# EAGLE board apu_mega_shield (EAGLE 6.5.0)
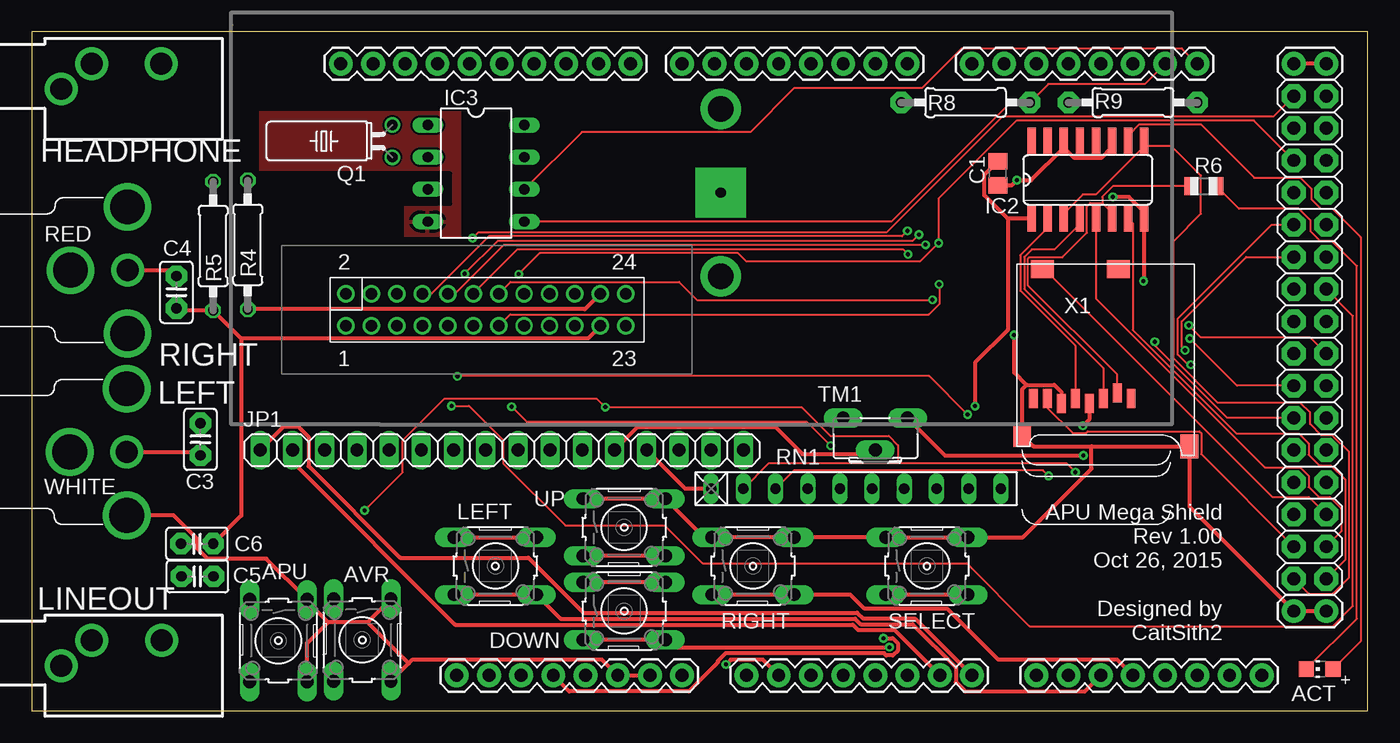
[diagram p0: board, top side]
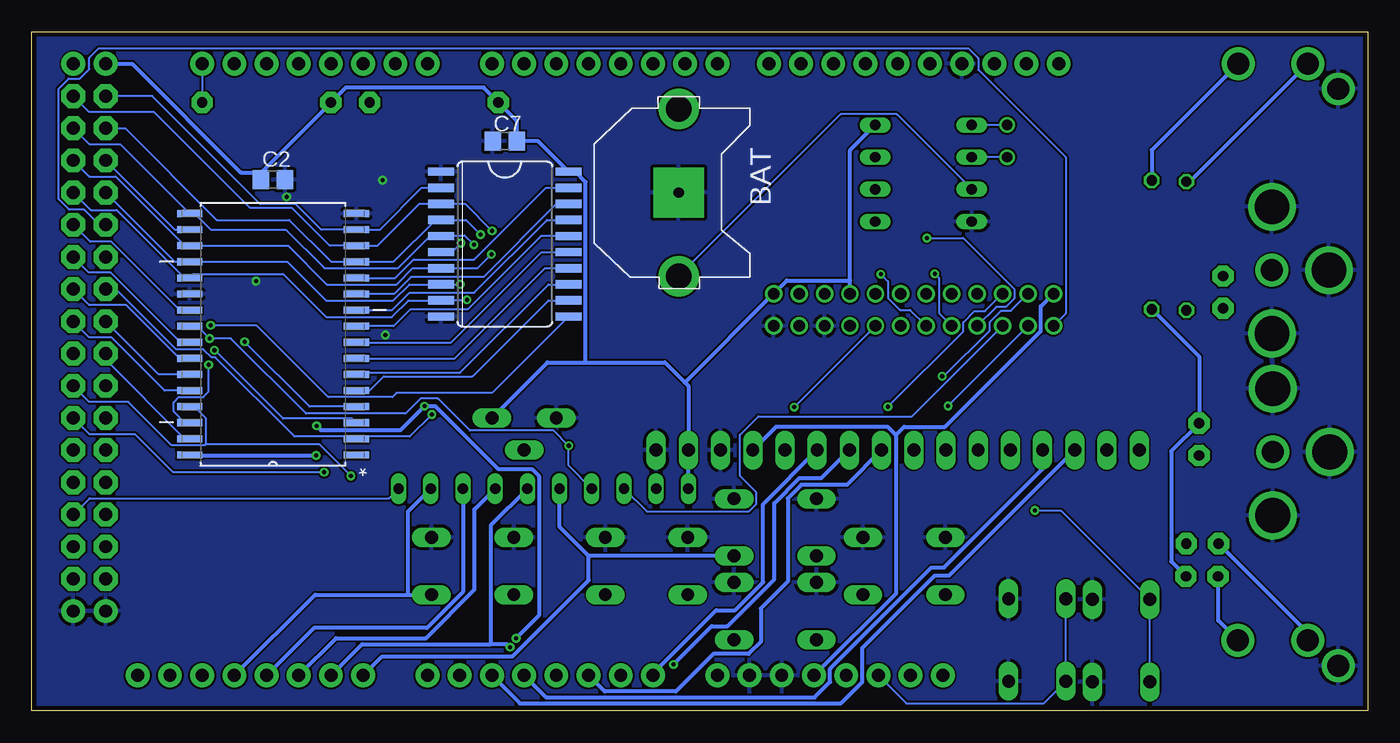
[diagram p1: board, bottom side, seen from below]

Size 105.39 x 53.59 mm. Coordinates in mm from the lower left corner, seen from the top.
Outline: 0,0 105.39,0 105.39,53.59 0,53.59 0,0
Copper layers (1*16): Top 0.0356mm / dielectric 1.5011mm / Bottom 0.0356mm
Design rules "oshpark-2layer": minimum track width 6mil, minimum drill 13mil, track to track 6mil, track to pad 6mil, pad to pad 6mil, via to via 6mil, smd to smd 6mil, copper to edge 15mil, drill to drill 6mil, minimum pad ring 7mil, minimum via ring 7mil, stop-mask expansion 4mil, vias tented up to drill 0mil, thermal gap 10mil
Net classes: 0 default: width 0.152 mm, clearance 0.152 mm; 1 supply: width 0.305 mm, clearance 0.152 mm; 2 audio: width 0.305 mm, clearance 0.152 mm
tRestrict: 8 lines

## Footprints (pad centres in the part's own frame; a part is rotated, then mirrored left to right if it is on the bottom)
CHIP-LED0805 = smd 1.2 x 1.2: A 0,-1.05; C 0,1.05
B3F-10XX = drill 1.016 long: 1 -3.251,2.261; 2 3.251,2.261; 3 -3.251,-2.261; 4 3.251,-2.261
CR1220-THM = drill 2 pad 3.175: +1 -6.604,0; +2 6.604,0 | drill 0.8 pad 3.962 square: - 0,0
C0805 = smd 1.3 x 1.5: 1 -0.95,0; 2 0.95,0
C025-025X050 = drill 0.813 pad 1.676 octagon: 1 -1.27,0; 2 1.27,0
SO20W = smd 0.66 x 2.032: 1 -5.715,-5.029; 2 -4.445,-5.029; 3 -3.175,-5.029; 4 -1.905,-5.029; 5 -0.635,-5.029; 6 0.635,-5.029; 7 1.905,-5.029; 8 3.175,-5.029; 9 4.445,-5.029; 10 5.715,-5.029; 11 5.715,5.029; 12 4.445,5.029; 13 3.175,5.029; 14 1.905,5.029; 15 0.635,5.029; 16 -0.635,5.029; 17 -1.905,5.029; 18 -3.175,5.029; 19 -4.445,5.029; 20 -5.715,5.029
SO16 = smd 0.66 x 2.032: 1 -4.445,-3.073; 2 -3.175,-3.073; 3 -1.905,-3.073; 4 -0.635,-3.073; 5 0.635,-3.073; 6 1.905,-3.073; 7 3.175,-3.073; 8 4.445,-3.073; 9 4.445,3.073; 10 3.175,3.073; 11 1.905,3.073; 12 0.635,3.073; 13 -0.635,3.073; 14 -1.905,3.073; 15 -3.175,3.073; 16 -4.445,3.073
DIL08 = drill 0.813 long: 1 -3.81,-3.81; 2 -1.27,-3.81; 3 1.27,-3.81; 4 3.81,-3.81; 5 3.81,3.81; 6 1.27,3.81; 7 -1.27,3.81; 8 -3.81,3.81
1X16 = drill 1.016 long: 1 -19.05,0; 2 -16.51,0; 3 -13.97,0; 4 -11.43,0; 5 -8.89,0; 6 -6.35,0; 7 -3.81,0; 8 -1.27,0; 9 1.27,0; 10 3.81,0; 11 6.35,0; 12 8.89,0; 13 11.43,0; 14 13.97,0; 15 16.51,0; 16 19.05,0
TC38H = drill 0.813: 1 -1.27,0; 2 1.27,0
0207/10 = drill 0.813 octagon: 1 -5.08,0; 2 5.08,0
R0805 = smd 1.1 x 1.4: 1 -1,0; 2 1,0
0207/10' = drill 0.813 pad 1.676 octagon: 1 -5.08,0; 2 5.08,0
RN-10 = drill 0.813 long: 1 -11.43,0; 2 -8.89,0; 3 -6.35,0; 4 -3.81,0; 5 -1.27,0; 6 1.27,0; 7 3.81,0; 8 6.35,0; 9 8.89,0; 10 11.43,0
CA6H = drill 1.016 long: A -2.54,0; E 2.54,0; S 0,2.54
SOIC127P1412X305-32N = smd 1.981 x 0.559: 1 -6.579,9.525; 2 -6.579,8.255; 3 -6.579,6.985; 4 -6.579,5.715; 5 -6.579,4.445; 6 -6.579,3.175; 7 -6.579,1.905; 8 -6.579,0.635; 9 -6.579,-0.635; 10 -6.579,-1.905; 11 -6.579,-3.175; 12 -6.579,-4.445; 13 -6.579,-5.715; 14 -6.579,-6.985; 15 -6.579,-8.255; 16 -6.579,-9.525; 17 6.579,-9.525; 18 6.579,-8.255; 19 6.579,-6.985; 20 6.579,-5.715; 21 6.579,-4.445; 22 6.579,-3.175; 23 6.579,-1.905; 24 6.579,-0.635; 25 6.579,0.635; 26 6.579,1.905; 27 6.579,3.175; 28 6.579,4.445; 29 6.579,5.715; 30 6.579,6.985; 31 6.579,8.255; 32 6.579,9.525
APU = drill 0.914: P$1 0,0; P$2 0,-2.54; P$3 -2.007,0; P$4 -2.007,-2.54; P$5 -4.013,0; P$6 -4.013,-2.54; P$7 -6.02,0; P$8 -6.02,-2.54; P$9 -8.026,0; P$10 -8.026,-2.54; P$11 -10.033,0; P$12 -10.033,-2.54; P$13 -12.04,0; P$14 -12.04,-2.54; P$15 -14.046,0; P$16 -14.046,-2.54; P$17 -16.053,0; P$18 -16.053,-2.54; P$19 -18.059,0; P$20 -18.059,-2.54; P$21 -20.066,0; P$22 -20.066,-2.54; P$23 -22.073,0; P$24 -22.073,-2.54
SJ1-3533N = drill 1.727: GND -4.7,0; LEFT 3.2,2; RIGHT -2.3,2
RCJ-01X = drill 2.743: PGND1 0,5; PGND2 4.5,0; PGND3 0,-5 | drill 1.727: PSIG 0,0
ARDUINO_MEGA2560_LITE_NO_LABELS = drill 1.016 pad 1.88: 0 63.5,50.8; 1 60.96,50.8; 2 58.42,50.8; 3 55.88,50.8; 3.3V 35.56,2.54; 4 53.34,50.8; 5 50.8,50.8; 5V 38.1,2.54; 5V. 93.98,50.8; 5V.. 96.52,50.8; 6 48.26,50.8; 7 45.72,50.8; 8 41.656,50.8; 9 39.116,50.8; 10 36.576,50.8; 11 34.036,50.8; 12 31.496,50.8; 13 28.956,50.8; 14 68.58,50.8; 15 71.12,50.8; 16 73.66,50.8; 17 76.2,50.8; 18 78.74,50.8; 19 81.28,50.8; 20 83.82,50.8; 21 86.36,50.8; A0 50.8,2.54; A1 53.34,2.54; A2 55.88,2.54; A3 58.42,2.54; A4 60.96,2.54; A5 63.5,2.54; A6 66.04,2.54; A7 68.58,2.54; A8 73.66,2.54; A9 76.2,2.54; A10 78.74,2.54; A11 81.28,2.54; A12 83.82,2.54; A13 86.36,2.54; A14 88.9,2.54; A15 91.44,2.54; AREF 23.876,50.8; GND 26.416,50.8; GND. 43.18,2.54; GND.. 40.64,2.54; GND... 93.98,7.62; GND.... 96.52,7.62; I/OREF 30.48,2.54; N/C 27.94,2.54; RESET 33.02,2.54; SCL1 18.796,50.8; SDA1 21.336,50.8; VIN 45.72,2.54 | drill 1.016 pad 1.88 octagon: 22 93.98,48.26; 23 96.52,48.26; 24 93.98,45.72; 25 96.52,45.72; 26 93.98,43.18; 27 96.52,43.18; 28 93.98,40.64; 29 96.52,40.64; 30 93.98,38.1; 31 96.52,38.1; 32 93.98,35.56; 33 96.52,35.56; 34 93.98,33.02; 35 96.52,33.02; 36 93.98,30.48; 37 96.52,30.48; 38 93.98,27.94; 39 96.52,27.94; 40 93.98,25.4; 41 96.52,25.4; 42 93.98,22.86; 43 96.52,22.86; 44 93.98,20.32; 45 96.52,20.32; 46 93.98,17.78; 47 96.52,17.78; 48 93.98,15.24; 49 96.52,15.24; 50 93.98,12.7; 51 96.52,12.7; 52 93.98,10.16; 53 96.52,10.16
MICROSD = smd 0.7 x 1.5: 1 9,-10.64; 2 7.9,-10.24; 3 6.8,-10.64; 4 5.7,-11.04; 5 4.6,-10.64; 6 3.5,-11.04; 7 2.4,-10.64; 8 1.3,-10.64 | smd 1.8 x 1.4: CD1 2,-0.44; CD2 8,-0.44 | smd 1.4 x 1.9: MT1 0.4,-13.54; MT2 13.6,-14.44

## Placement (x,y rotation side)
ACT  RED  [CHIP-LED0805]  101.6,3.3 90 top
APU  Reset  [B3F-10XX]  19.46,5.54 270 top
AVR  Reset  [B3F-10XX]  26.07,5.59 270 top
BAT  CR1220  [CR1220-THM]  54.36,40.89 270 bottom
C1  100nF  [C0805]  76.2,42.42 270 top
C2  100nF  [C0805]  86.36,41.91 180 bottom
C3  1uF  [C025-025X050]  13.31,21.42 270 top
C4  1uF  [C025-025X050]  11.42,33.03 90 top
C5  1uF  [C025-025X050]  13.08,10.61 180 top
C6  1uF  [C025-025X050]  13.04,13.19 180 top
C7  100nF  [C0805]  68.07,44.96 0 bottom
DOWN  [B3F-10XX]  46.74,7.87 0 top
IC1  74HCT573D  [SO20W]  68.07,36.83 270 bottom
IC2  4050D  [SO16]  83.31,41.91 0 top
IC3  DS1307  [DIL08]  35.05,42.42 270 top
JP1  [1X16]  37.08,20.57 0 top
LEFT  [B3F-10XX]  36.58,11.43 0 top
Q1  32.768  [TC38H]  28.45,44.96 90 top
R4  50  [0207/10]  17.04,36.77 270 top
R5  50  [0207/10]  14.31,36.68 270 top
R6  1K  [R0805]  92.46,41.4 0 top
R8  2.2k  [0207/10']  73.66,48.01 180 top
R9  2.2k  [0207/10']  86.87,48.01 0 top
RIGHT  [B3F-10XX]  56.9,11.43 0 top
RN1  [RN-10]  65.02,17.53 0 top
SELECT  [B3F-10XX]  70.61,11.43 0 top
TM1  10K  [CA6H]  66.55,23.11 180 top
U1  IS62C1024AL-35QLI  [SOIC127P1412X305-32N]  86.36,29.72 180 bottom
U$1  APU  [APU]  24.8,30.37 180 top
U$2  HEADPHONE  [SJ1-3533N]  7.03,49.07 0 top
U$3  HEADPHONE  [SJ1-3533N]  7.04,3.56 0 top
U$4  RCA  [RCJ-01X]  7.5,20.42 180 top
U$5  RCA  [RCJ-01X]  7.56,34.77 180 top
U$6  ARDUINO_MEGA_2560_LITENO_LABELS  [ARDUINO_MEGA2560_LITE_NO_LABELS]  5.59,0.25 0 top
UP  [B3F-10XX]  46.74,14.48 0 top
X1  MICROSD  [MICROSD]  77.72,35.31 0 top

## Library data of the parts
ACT BAT IC3 R6 R8 R9 X1 = adafruit
APU AVR DOWN LEFT RIGHT SELECT UP = switch-omron
C1 C2 C7 R4 R5 = rcl
C3-C6 = rcl-ez
IC1 = 74xx-eu
IC2 = 40xx
JP1 = pinhead
Q1 = crystal
RN1 = resistor-net; OC_FARNELL: unknown; OC_NEWARK: unknown
TM1 = pot
U1 = ISSI_By_element14_Batch_1; MPN: IS62C1024AL-35QLI; OC_FARNELL: 1869973; OC_NEWARK: 43M5399; PACKAGE: SOIC-32; SUPPLIER: INTEGRATED SILICON SOLUTION (ISSI)
U$1-U$5 = caitsith2
U$6 = E14_Arduino_revB

## Nets
!RD: RN1.4 U1.24 U$1.P$6 U$6.40
!WR: RN1.3 U1.29 U$1.P$5 U$6.41
+3V3 [supply]: C1.1 IC2.1 U$6.3.3V X1.4
A0: IC1.19 U1.12
A1: IC1.18 U1.11
A2: IC1.17 U1.10
A3: IC1.16 U1.9
A4: IC1.15 U1.8
A5: IC1.14 U1.7
A6: IC1.13 U1.6
A7: IC1.12 U1.5
A8: U1.28 U$6.37
A9: U1.27 U$6.36
A10: U1.26 U$1.P$3 U$6.35
A11: U1.2 U$1.P$4 U$6.34
A12: U1.25 U$6.33
A13: U1.3 U$6.32
A14: U1.23 U$6.31
A15: U1.30 U$1.P$1 U$6.30
A16: U1.31 U$6.38
A17: U1.4 U$6.42
ALEFT [audio]: C3.1 C5.1 R4.2 U$1.P$22
ARIGHT [audio]: C4.1 C6.1 R5.2 U$1.P$21
CD: RN1.10 U$6.49 X1.CD1
CLK: IC2.3 IC2.9 U$6.52
CS: IC2.7 U$6.53
D0: IC1.2 U1.15 U$1.P$7 U$6.22
D1: IC1.3 U1.14 U$1.P$8 U$6.23
D2: IC1.4 U1.13 U$1.P$9 U$6.24
D3: IC1.5 U1.17 U$1.P$10 U$6.25
D4: IC1.6 U1.18 U$1.P$11 U$6.26
D5: IC1.7 U1.19 U$1.P$12 U$6.27
D6: IC1.8 U1.20 U$1.P$13 U$6.28
D7: IC1.9 U1.21 U$1.P$14 U$6.29
DI: IC2.5 U$6.51
DO: U$6.50 X1.7
DOWN [supply]: DOWN.3 DOWN.4 RN1.6 U$6.A9
GND [supply]: APU.1 APU.2 AVR.1 AVR.2 BAT.- C1.2 C2.1 C7.1 DOWN.1 DOWN.2 IC1.1 IC1.10 IC2.8 IC2.11 IC2.14 IC3.4 JP1.14 JP1.16 LEFT.1 LEFT.2 RIGHT.1 RIGHT.2 SELECT.1 SELECT.2 TM1.E U1.16 U1.22 U$1.P$19 U$1.P$23 U$2.GND U$3.GND U$4.PGND1 U$4.PGND2 U$4.PGND3 U$5.PGND1 U$5.PGND2 U$5.PGND3 U$6.GND U$6.GND. U$6.GND.. U$6.GND... U$6.GND.... UP.1 UP.2 X1.6 X1.MT1 X1.MT2
LE: IC1.11 U$6.39
LEFT [supply]: LEFT.3 LEFT.4 RN1.7 U$6.A10
N$1: AVR.3 AVR.4 U$6.RESET
N$2 [audio]: C3.2 U$4.PSIG
N$3 [audio]: C4.2 U$5.PSIG
N$4 [audio]: C5.2 U$3.LEFT
N$5: ACT.A IC2.10
N$6: IC2.2 X1.5
N$7: IC2.6 R6.1 X1.2
N$8 [audio]: C6.2 U$3.RIGHT
N$9 [audio]: R4.1 U$2.LEFT
N$10 [audio]: R5.1 U$2.RIGHT
N$11: ACT.C R6.2
N$12: IC2.4 X1.3
N$13 [supply]: JP1.12 TM1.S
N$14 [supply]: JP1.11 U$6.A0
N$15 [supply]: JP1.10 U$6.A1
N$16 [supply]: JP1.9 U$6.A2
N$17 [supply]: JP1.4 U$6.A4
N$18 [supply]: JP1.3 U$6.A5
N$19 [supply]: JP1.2 U$6.A6
N$20 [supply]: JP1.1 U$6.A7
N$21: IC3.1 Q1.2
N$22: IC3.2 Q1.1
N$39: BAT.+2 IC3.3
RIGHT [supply]: RIGHT.3 RIGHT.4 RN1.8 U$6.A11
RST: APU.3 APU.4 RN1.2 U$1.P$15 U$6.43
SCL: IC3.6 R9.2 U$6.21
SDA: IC3.5 R8.1 U$6.20
SELECT [supply]: RN1.9 SELECT.3 SELECT.4 U$6.A12
UP [supply]: RN1.5 U$6.A8 UP.3 UP.4
VCC [supply]: C2.2 C7.2 IC1.20 IC3.8 JP1.13 JP1.15 R8.2 R9.1 RN1.1 TM1.A U1.32 U$1.P$2 U$1.P$18 U$1.P$24 U$6.5V U$6.5V. U$6.5V..

## Tracks (layer width: path | path; a pad name or v marks a point on that pad's centre or on a via)
!RD  (via drill 0.33 pad 0.69)
  Top 0.152: v63.03,20.92 61.17,22.79 39.06,22.79 v37.85,24 | U$6.40 95.08,25.65 v91.35,29.38
  Bottom 0.152: v37.85,24 31.91,29.94 31.91,30.64 31.02,31.53 30.19,31.53 U$1.P$6 | RN1.4 63.03,19.35 v63.03,20.92 64.22,22.11 70.82,22.11 73.34,24.63 74.73,24.63 75.91,23.45 83.76,23.45 89.69,29.38 v91.35,29.38 92.32,30.35 U1.24
!WR  (via drill 0.33 pad 0.69)
  Top 0.152: v80.22,18.53 79.77,18.98 60.13,18.98 RN1.3
  Bottom 0.152: RN1.3 56.87,15.72 48.82,15.72 48.23,16.32 48.23,17.24 49.53,18.55 49.53,21.77 48.07,23.23 35.95,23.23 U$1.P$5 | 91.67,21.05 91.76,20.96 94.34,20.96 97.77,24.38 100.84,24.38 U$6.41 | U1.29 92.57,24 91.67,23.1 91.67,21.05 | 91.67,21.05 82.73,21.05 v80.22,18.53
+3V3  (via drill 0.33 pad 0.69)
  Top 0.305: X1.4 83.42,22.99 v82.92,22.49 | 77,38.84 77,30.07 74.41,27.48 v74.41,24.05 | v67.18,5.73 67.92,5.73 68.31,5.34 68.31,4.76 67.93,4.38 67.39,4.38 67.23,4.54 54.73,4.54 54.12,3.93 54.12,3.83 51.83,1.54 42.4,1.54 U$6.3.3V | 77,38.84 75.14,40.69 75.14,42.31 C1.1 | IC2.1 77,38.84
  Bottom 0.305: v82.92,22.49 82.58,22.15 76.31,22.15 v74.41,24.05 73.57,24.05 68.61,19.09 65.93,19.09 65.37,18.53 65.37,7.54 v67.18,5.73
A0
  Bottom 0.152: U1.12 76.71,34.16 75.26,35.61 70.5,35.61 64.84,41.27 IC1.19
A1
  Bottom 0.152: IC1.18 63.99,40 69.76,34.24 75.47,34.24 76.81,32.89 U1.11
A2
  Bottom 0.152: U1.10 76.97,31.62 75.59,33 70.49,33 64.76,38.73 IC1.17
A3
  Bottom 0.152: IC1.16 65.22,37.46 71.01,31.67 75.53,31.67 76.85,30.35 U1.9
A4
  Bottom 0.152: U1.8 72.3,29.08 65.19,36.2 IC1.15
A5
  Bottom 0.152: U1.7 72.02,27.81 64.91,34.92 IC1.14
A6
  Bottom 0.152: U1.6 79.63,26.7 71.59,26.7 64.63,33.66 IC1.13
A7
  Bottom 0.152: U1.5 78.74,25.27 77.62,26.39 70.62,26.39 64.63,32.38 IC1.12
A8
  Bottom 0.152: U1.28 94.91,25.27 99.1,29.46 100.84,29.46 U$6.37
A9
  Bottom 0.152: U1.27 95.38,26.54 U$6.36
A10  (via drill 0.33 pad 0.69)
  Top 0.152: v33.11,24.06 34.5,24.06 37.19,21.37 37.19,19.53 42.09,14.63 49.93,14.63 52.92,11.64 73.75,11.64 78.7,6.69 102.64,6.69 104.22,8.27 104.22,31.16 U$6.35
  Bottom 0.152: U1.26 93.73,27.81 97.92,32 100.84,32 U$6.35 | v33.11,24.06 U$1.P$3
A11  (via drill 0.33 pad 0.69)
  Top 0.152: v73.83,23.39 70.81,26.41 v33.58,26.41
  Bottom 0.152: 79.78,21.65 84.67,21.65 90.91,27.89 91.21,27.89 91.86,28.53 94,28.53 98.75,33.27 U$6.34 | 79.78,21.65 U1.2 | v73.83,23.39 75.56,21.65 79.78,21.65 | v33.58,26.41 33.43,26.41 29.81,30.03 29.81,30.67 28.91,31.57 28.14,31.57 U$1.P$4
A12
  Bottom 0.152: U1.25 93.65,29.08 99.17,34.6 100.89,34.6 U$6.33
A13  (via drill 0.33 pad 0.69)
  Top 0.152: v90.97,28.46 90.71,28.73 90.71,30.72 95.8,35.81 U$6.32
  Bottom 0.152: U1.3 80.11,23.06 85.58,23.06 v90.97,28.46
A14
  Bottom 0.152: U1.23 93.72,31.62 99.11,37.01 100.77,37.01 U$6.31
A15  (via drill 0.33 pad 0.69)
  Top 0.152: v91.43,27.31 91.19,27.31 90.4,28.1 90.4,30.95 97.8,38.35 U$6.30
  Bottom 0.152: U1.30 93.31,22.73 94.21,23.64 94.21,24.34 93.78,24.77 91.85,24.77 91.43,25.18 v91.43,27.31 | U$6.30 100.08,38.35 101.27,39.54 102.44,39.54 103.28,40.38 103.28,49.09 102.48,49.89 101.6,49.89 100.84,50.65 100.84,51.53 100.1,52.27 31.52,52.27 30.73,51.48 30.73,50.59 23.83,43.68 23.83,31.34 U$1.P$1
A16
  Bottom 0.152: U1.31 93.31,21.46 99.57,27.72 U$6.38
A17  (via drill 0.33 pad 0.69)
  Top 0.152: U$6.42 94.32,23.11 88.59,28.84 v88.59,29.12
  Bottom 0.152: U1.4 83.48,24 v88.59,29.12
ALEFT
  Top 0.305: U$1.P$22 43.64,31.69 R4.2
  Bottom 0.305: C5.1 15.51,11.78 15.51,20.49 C3.1 13.31,27.96 R4.2
ARIGHT
  Top 0.305: U$1.P$21 43.87,29.38 16.53,29.38 | C4.1 11.58,31.6 R5.2 16.53,29.38 | 16.53,29.38 16.53,15.41 C6.1
CD
  Top 0.152: X1.CD1 79.87,34.87 97.87,16.87 100.74,16.87 U$6.49
  Bottom 0.152: U$6.49 100.82,16.78 77.2,16.78 RN1.10
CLK
  Top 0.152: 87.76,44.57 83.93,40.74 82.91,40.74 81.41,39.24 IC2.3 | IC2.9 87.76,44.57 | U$6.52 100.74,9.24 102.61,9.24 103.92,10.54 103.92,20.43 102.6,21.74 101.73,21.74 100.84,22.63 100.84,23.53 100.06,24.31 93.56,24.31 90.09,27.78 90.09,37.08 92.23,39.23 92.23,42.24 89.91,44.57 87.76,44.57
CS
  Top 0.152: IC2.7 86.85,38.47 86.85,30.05 95.02,21.88 99.94,21.88 100.74,21.08 100.74,20.19 101.57,19.36 102.49,19.36 103.6,18.24 103.6,11.91 U$6.53
D0  (via drill 0.33 pad 0.69)
  Top 0.152: U$6.22 97.94,46.89 76.57,46.89 67.43,37.75 35.23,37.75 v34.78,37.31
  Bottom 0.152: v34.78,37.31 31.91,37.31 27.89,33.29 27.89,32.53 28.54,31.88 29.31,31.88 U$1.P$7 | IC1.2 74.62,41.27 77.92,37.97 U1.15 82.55,37.97 84.56,39.98 87.35,39.98 95.89,48.51 U$6.22
D1  (via drill 0.33 pad 0.69)
  Top 0.152: v69.07,37.87 68.65,37.45 36.07,37.45 31.53,32.91 U$1.P$8
  Bottom 0.152: v69.07,37.87 71.21,40 IC1.3 74.81,40 78.11,36.7 U1.14 81.88,36.7 84.86,39.68 88.17,39.68 95.73,47.24 100.84,47.24 U$6.23
D2  (via drill 0.33 pad 0.69)
  Top 0.152: v34.16,34.49 36.77,37.1 69.51,37.1 v69.98,37.58
  Bottom 0.152: v34.16,34.49 33.83,34.15 33.83,31.37 U$1.P$9 | v69.98,37.58 71.14,38.73 IC1.4 73.55,38.73 76.85,35.43 U1.13 81.77,35.43 85.07,38.74 90.79,38.74 98.03,45.97 U$6.24
D3  (via drill 0.33 pad 0.69)
  Top 0.152: U$1.P$10 33.39,32.91 37.27,36.78 v70.51,36.78
  Bottom 0.152: v70.51,36.78 71.24,37.52 73.05,37.52 IC1.5 73.97,37.46 76.51,34.92 82.31,34.92 85.36,37.97 91.26,37.97 92.53,39.24 U1.17 98.4,44.7 100.84,44.7 U$6.25
D4  (via drill 0.33 pad 0.69)
  Top 0.152: v38.42,34.45 40.07,36.11 55.73,36.11 56.38,35.45 70.08,35.45 v71.54,36.91 71.54,40.44 77.68,46.58 96.42,46.58 U$6.26
  Bottom 0.152: v38.42,34.45 37.84,33.88 37.84,32.58 36.9,31.64 36.1,31.64 U$1.P$11 | v71.54,36.91 72.25,36.2 IC1.6 | U$6.26 94.11,37.97 U1.18
D5  (via drill 0.33 pad 0.69)
  Top 0.152: U$1.P$12 38.34,36.42 68.73,36.42 v69.13,36.03
  Bottom 0.152: v69.13,36.03 70.23,34.92 IC1.7 75.33,34.92 76.61,33.66 82.12,33.66 85.17,36.7 U1.19 93.32,36.7 98.78,42.16 100.84,42.16 U$6.27
D6  (via drill 0.33 pad 0.69)
  Top 0.152: U$1.P$13 37.75,31.29 70.77,31.29 71.63,32.15 71.63,33.6 v71.58,33.66
  Bottom 0.152: v71.58,33.66 IC1.8 75.59,33.66 76.87,32.38 82.17,32.38 85.23,35.43 U1.20 94.11,35.43 U$6.28
D7  (via drill 0.33 pad 0.69)
  Top 0.152: U$1.P$14 37.77,33.84 51.06,33.84 52.47,32.43 v71.06,32.43
  Bottom 0.152: v71.06,32.43 71.11,32.38 IC1.9 75.67,32.38 76.99,31.06 82.15,31.06 85.58,34.48 92.62,34.48 U1.21 93.34,34.16 98.7,39.52 100.74,39.52 U$6.29
DI
  Top 0.152: IC2.5 83.95,32.53 97.27,19.2 100.07,19.2 100.74,18.54 100.74,17.65 101.52,16.87 102.39,16.87 103.3,15.96 103.3,14.14 U$6.51
DO
  Top 0.152: X1.7 80.12,23.91 82.12,21.92 83.16,21.92 83.3,22.06 92.11,22.06 92.25,21.91 92.25,20.27 U$6.50
DOWN  (via drill 0.33 pad 0.69)
  Top 0.305: v67.66,5.03 50.58,5.03 DOWN.4 DOWN.3
  Bottom 0.305: v67.66,5.03 67.9,5.26 69.19,5.26 | U$6.A9 79.32,5.26 69.19,5.26 | RN1.6 69.19,14.63 69.19,5.26
GND  (via drill 0.33 pad 0.69)
  Top 0.305: v87.7,33.91 87.76,33.97 IC2.8 87.76,39.35 86.55,40.55 v85.29,40.55 | 81.41,44.45 IC2.14 | 81.41,44.45 78.83,41.88 v77.71,41.88 77.31,41.47 C1.2 | 81.41,44.45 82.19,43.66 84.41,43.66 85.22,44.47 IC2.11 | 83.6,20.87 X1.MT2 91.32,16.12 U$6.GND... U$6.GND.... | 83.6,20.87 79.02,20.87 X1.MT1 78.12,25.37 78.48,25.72 | 83.6,20.87 83.6,19.1 78.19,13.69 SELECT.2 SELECT.1 RIGHT.2 RIGHT.1 53.03,13.69 UP.2 UP.1 | 78.48,25.72 80.66,25.72 81.22,25.16 X1.6 | 78.48,25.72 77.5,26.7 v77.5,29.66 | 29.74,3.75 30.05,4.06 44.96,4.06 U$6.GND.. U$6.GND. | AVR.2 29.74,3.75 | 29.74,3.75 26.48,7 | 26.48,7 23.37,7 | AVR.1 26.48,7 | 23.37,7 21.72,8.65 APU.1 18.5,12.01 13.87,12.01 13.04,12.83 13.04,13.58 11.2,15.42 U$4.PGND1 | APU.2 21.72,5.35 23.37,7 | DOWN.2 DOWN.1 | LEFT.1 LEFT.2
  pour Top: 29.46,37.34 34.04,37.34 34.04,47.24 17.78,47.24 17.78,42.67 33.02,42.67 32.89,40.13 29.34,40.13
  pour Bottom: 0,53.59 107.19,53.59 107.19,-0.25 0,-0.25
LE  (via drill 0.33 pad 0.69)
  Top 0.152: U$6.39 100.84,29.46 92.23,29.46 v91.28,30.42
  Bottom 0.152: IC1.11 69.07,25.09 76.61,25.09 76.94,24.77 82.01,24.77 87.66,30.42 v91.28,30.42
LEFT
  Top 0.305: U$6.A10 83.07,1.54 73.65,1.54 72.9,2.29 72.9,3.42 69.48,6.84 65.38,6.84 64.95,7.26 41.73,7.26 LEFT.4 LEFT.3
  Bottom 0.305: U$6.A10 81.38,5.74 74.3,5.74 70.46,9.58 70.46,15.9 RN1.7
N$1
  Bottom 0.152: U$6.RESET 36.4,0.58 25.57,0.58 AVR.4 AVR.3
N$2
  Top 0.305: U$4.PSIG 13.04,20.42 C3.2
N$3
  Top 0.305: U$5.PSIG 10.95,34.77 C4.2
N$4
  Bottom 0.305: U$3.LEFT 11.81,7.13 C5.2
N$5
  Top 0.152: IC2.10 86.49,45.38 87.38,46.28 92.22,46.28 96.43,42.06 100.08,42.06 100.94,41.2 100.94,40.39 101.7,39.62 102.59,39.62 104.83,37.38 104.83,5.48 ACT.A
N$6
  Top 0.152: IC2.2 80.14,38.1 77.98,35.94 77.98,33.16 82.32,28.82 X1.5
N$7
  Top 0.152: 84.45,40.08 85.22,39.31 IC2.6 | X1.2 85.62,26.54 78.59,33.57 78.59,35.7 78.69,35.79 81.31,35.79 83.24,37.73 83.24,39.81 83.51,40.08 84.45,40.08 | R6.1 85.28,41.4 84.45,40.58 84.45,40.08
N$8
  Bottom 0.305: U$3.RIGHT 4.74,6.16 C6.2
N$9
  Bottom 0.305: U$2.LEFT 17.04,44.26 R4.1
N$10
  Bottom 0.305: U$2.RIGHT 14.04,41.76 R5.1
N$11
  Top 0.152: ACT.C 104.53,7.28 104.53,35.11 102.56,37.08 101.63,37.08 100.89,37.82 100.89,38.7 99.97,39.62 95.23,39.62 R6.2
N$12
  Top 0.152: IC2.4 82.68,38.4 80.69,36.41 78.88,36.41 78.29,35.82 78.29,33.29 84.52,27.05 X1.3
N$13
  Top 0.305: JP1.12 47.8,22.4 58.66,22.4 60.79,20.27 66.25,20.27 TM1.S
N$14
  Bottom 0.305: U$6.A0 56.39,2.96 51.41,7.94 49.91,7.94 47.7,10.14 47.7,16.31 JP1.11
N$15  (via drill 0.33 pad 0.69)
  Top 0.305: U$6.A1 57.68,4.04 55.14,4.04 v54.77,3.66
  Bottom 0.305: v54.77,3.66 51.75,6.68 50.52,6.68 46.82,10.38 46.82,16.38 44.84,18.36 43.11,18.36 JP1.10
N$16
  Bottom 0.305: JP1.9 41.09,17.84 44.68,17.84 45.75,16.78 45.75,10.21 47.89,8.08 47.89,5.44 48.83,4.49 51.63,4.49 54.59,1.53 60.21,1.53 U$6.A2
N$17
  Bottom 0.305: U$6.A4 64.81,1.05 43.65,1.05 42.42,2.28 42.42,3.31 34.43,11.3 33.44,11.3 25.65,19.09 JP1.4
N$18
  Bottom 0.305: U$6.A5 66.89,0.59 41.58,0.59 39.88,2.29 39.88,4.96 34.16,10.67 33.01,10.67 JP1.3
N$19
  Top 0.305: JP1.2 20.57,19.64 33.41,6.81 64.76,6.81 65.19,6.38 68.04,6.38 U$6.A6
N$20
  Top 0.305: JP1.1 19.89,22.43 21.03,22.43 21.84,21.62 21.84,19.31 29.07,12.08 39.19,12.08 43.52,7.75 65.11,7.75 65.57,7.29 69.67,7.29 U$6.A7
N$21
  Bottom 0.152: Q1.2 IC3.1
N$22
  Bottom 0.152: Q1.1 IC3.2
N$39
  Bottom 0.152: IC3.3 37.16,47.07 41.58,47.07 BAT.+2
RIGHT
  Top 0.305: U$6.A11 85.62,4.04 76.23,4.04 72.22,8.05 65.69,8.05 64.57,9.17 RIGHT.4 RIGHT.3
  Bottom 0.305: RN1.8 71.37,9.38 74.22,6.54 83.12,6.54 U$6.A11
RST  (via drill 0.33 pad 0.69)
  Top 0.152: 68.35,19.53 58.13,19.53 RN1.2 | 68.35,19.53 68.35,20.95 67.61,21.69 62.99,21.69 60.72,23.97 v45.24,23.97 44.57,24.64 32.59,24.64 29.26,21.32 29.26,18.82 v26.25,15.81 | v82.33,18.84 81.64,19.53 68.35,19.53
  Bottom 0.152: U$6.43 100.84,21.84 97.27,21.84 94.26,18.84 v82.33,18.84 | U$1.P$15 v45.24,23.97 | v26.25,15.81 24.23,15.81 APU.3 APU.4
SCL
  Top 0.152: U$6.21 90.74,52.26 73.35,52.26 70.22,49.13 60.15,49.13 56.7,45.68 43.4,45.68 IC3.6
  Bottom 0.152: U$6.21 R9.2
SDA
  Top 0.152: IC3.5 67.8,38.61 77.2,48.01 R8.1 80.19,49.46 87.81,49.46 U$6.20
SELECT
  Top 0.305: SELECT.4 SELECT.3
  Bottom 0.305: 75.72,9.17 SELECT.4 | U$6.A12 83.03,9.17 75.72,9.17 | 75.72,9.17 75.72,15.72 RN1.9
UP
  Top 0.305: UP.4 UP.3
  Bottom 0.305: 61.46,12.22 63.75,14.51 RN1.5 | U$6.A8 77.75,4.3 67.47,4.3 61.46,10.31 61.46,12.22 | UP.4 61.46,12.22
VCC  (via drill 0.33 pad 0.69)
  Top 0.305: TM1.A 72.06,20.15 v82.95,20.15 | RN1.1 51.56,17.53 JP1.13 | U$6.5V.. U$6.5V.
  Bottom 0.305: 87.31,42.48 C2.2 | 87.31,42.48 R9.1 80.62,49.17 69.75,49.17 R8.2 67.12,46.55 C7.2 65.46,44.96 IC1.20 62.5,42.54 61.69,41.74 61.69,27.49 | U$6.5V. 97.48,51.05 88.91,42.48 87.31,42.48 | 53.87,25.91 53.59,25.63 JP1.15 RN1.1 | 61.69,27.49 55.45,27.49 53.87,25.91 | 53.87,25.91 U$1.P$24 45.83,33.95 40.85,33.95 | TM1.A 64.71,27.49 61.69,27.49 | 37.24,21.75 36.59,22.4 33.37,22.4 25.8,29.97 25.8,31.91 U$1.P$2 | U1.32 92.89,20.15 v82.95,20.15 | 40.85,33.95 40.85,44.24 IC3.8 | U$1.P$18 40.85,33.95 | 37.24,21.75 37.24,9.24 U$6.5V | JP1.13 46.66,22.42 37.91,22.42 37.24,21.75

## Text on the board
tPlace: HEADPHONE | RED | RIGHT | LEFT | WHITE | APU Mega Shield / Rev 1.00 / Oct 26, 2015 / / Designed by / CaitSith2 | LINEOUT